# Altium PCB PCB3.PcbDoc
Units mm, origin at the board's own origin, x right, y up, seen from the top; angles counter-clockwise.
Board outline 44.5 x 62.5 mm, 2 copper layers (Top Layer, Bottom Layer); 28 components, 29 nets, 127 pads, 27 vias.
Unrouted connection lines stored in the file: 21.
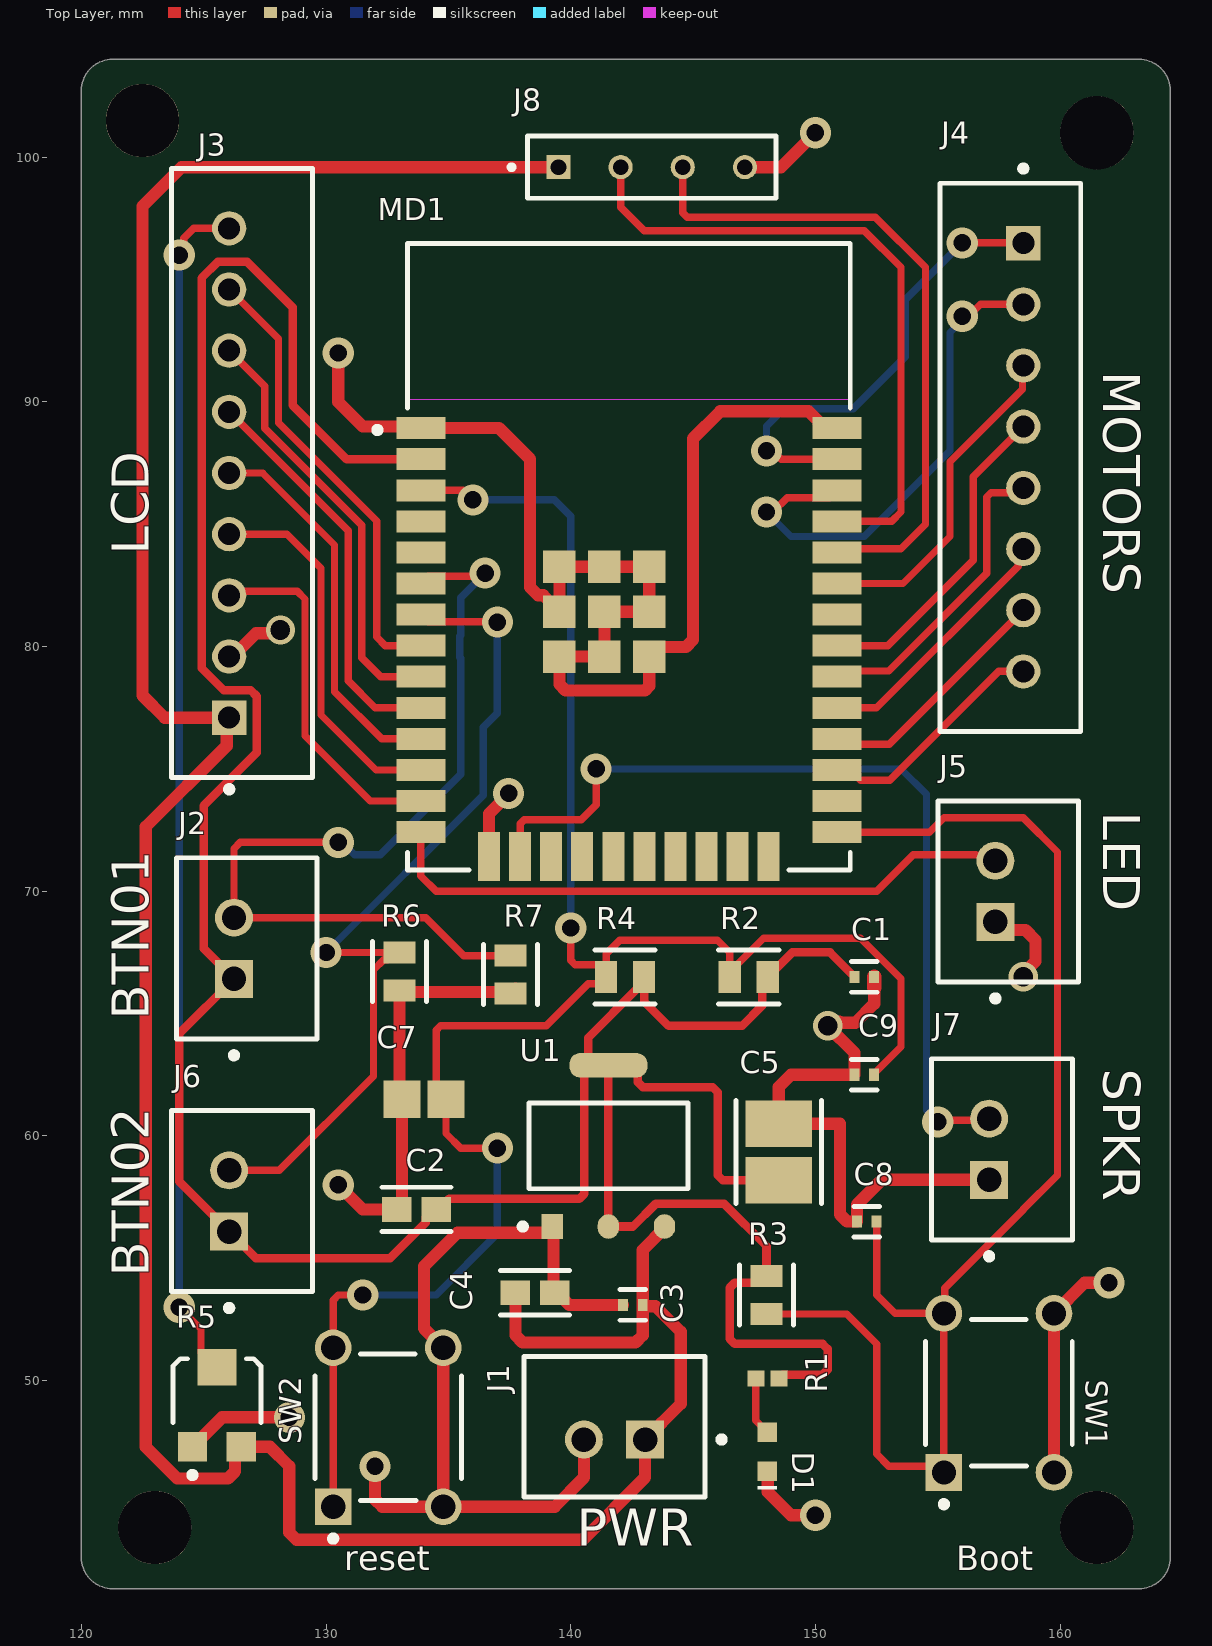
[diagram p0: Top Layer view]
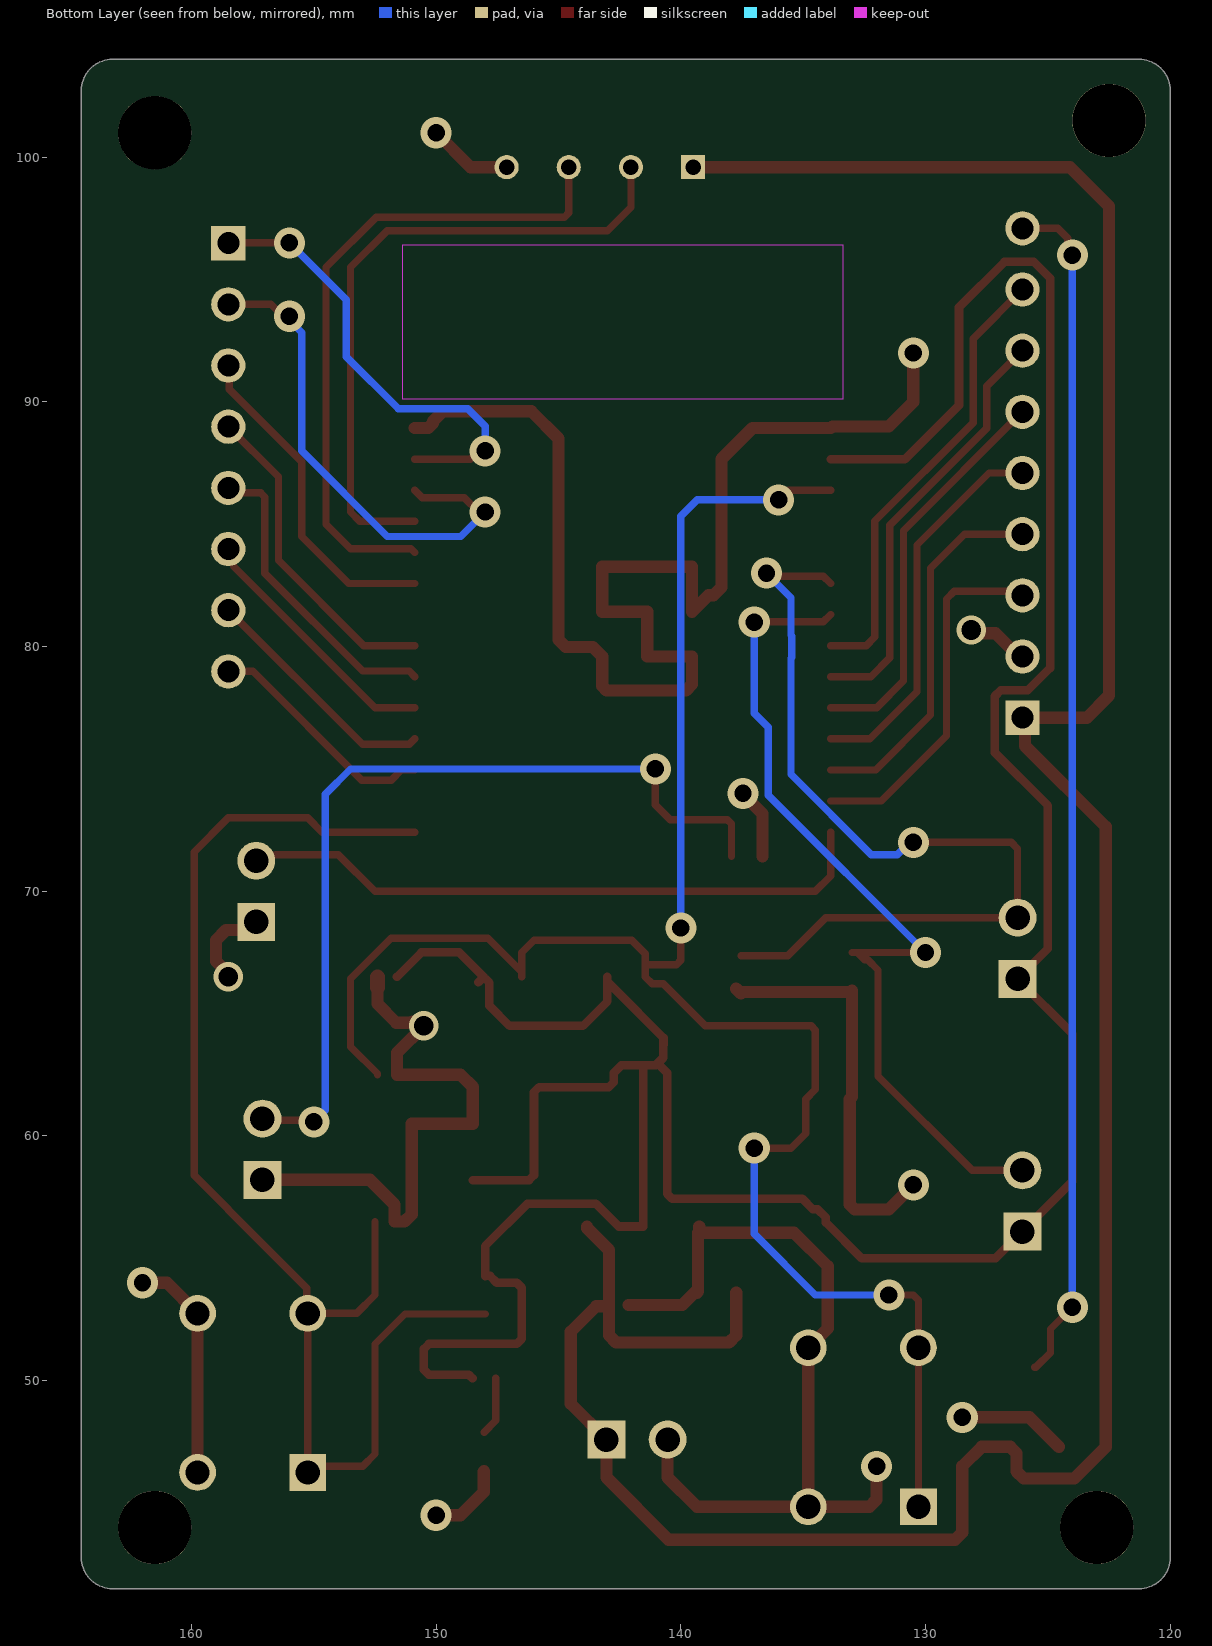
[diagram p1: Bottom Layer view, seen from below]
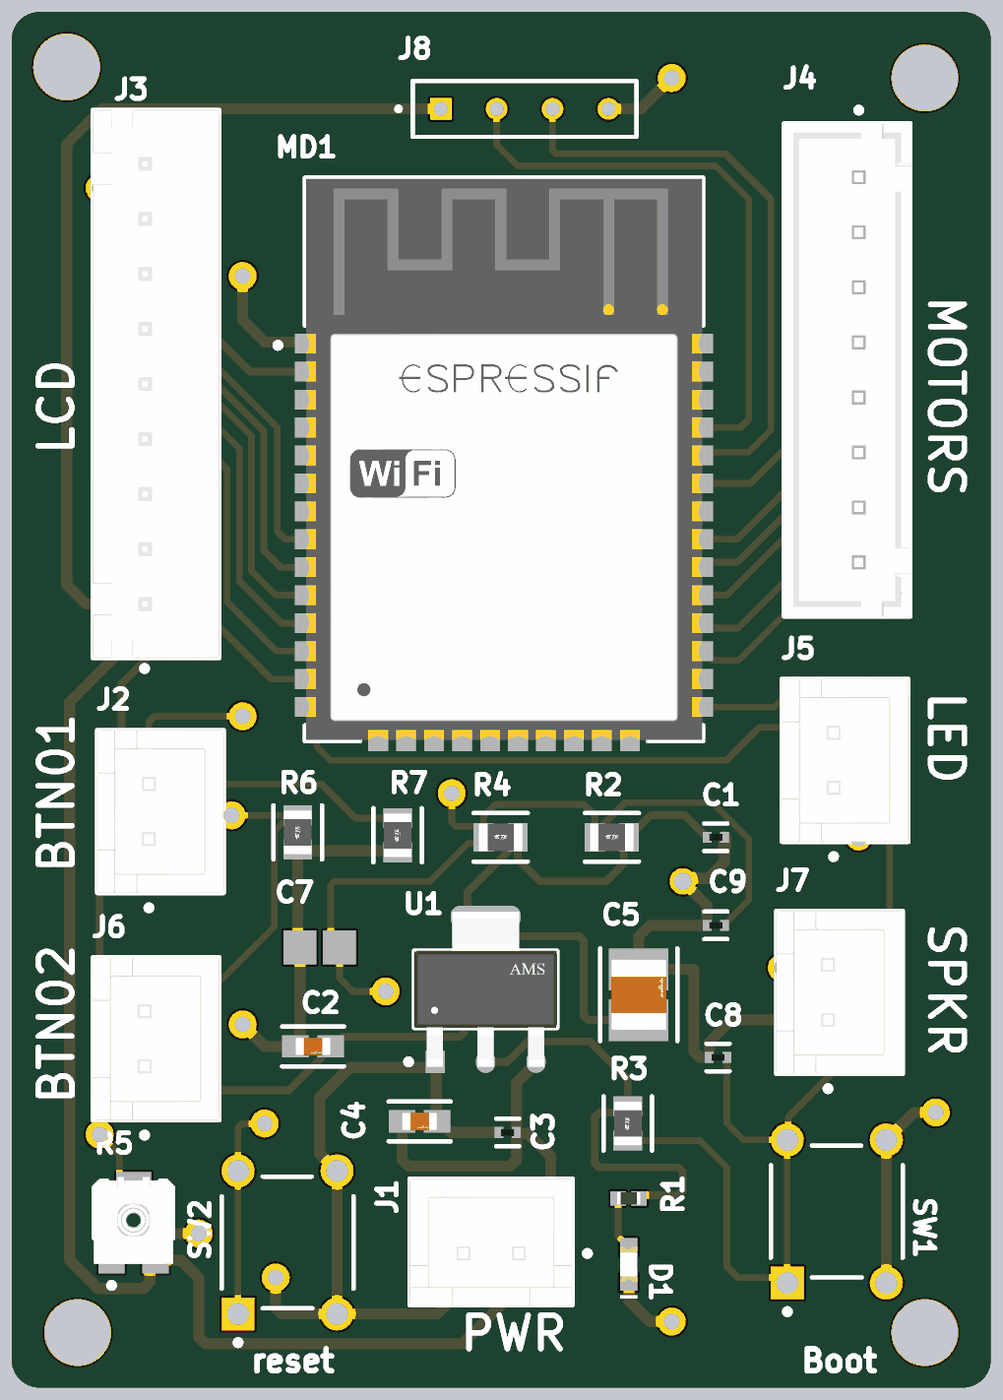
[diagram p2: 3D render of the assembled board from above, using the file's embedded part models]

## Layer stack, top to bottom
Top Solder: solder mask 0.0102, Solder Resist, Dk 3.5
Top Layer: signal copper 0.0356
Dielectric 1: dielectric 0.32, FR-4, Dk 4.8
Bottom Layer: signal copper 0.0356
Bottom Solder: solder mask 0.0102, Solder Resist, Dk 3.5

## Board outline
120,42.77 120,102.73 cw(c121.27,102.73) 121.27,104 163.23,104 cw(c163.23,102.73) 164.5,102.73 164.5,42.77 cw(c163.23,42.77) 163.23,41.5 121.27,41.5 cw(c121.27,42.77)

## Design rules (kind name [scope] priority, off if disabled: settings)
Clearance Clearance_1 [All] p1: gap=0.254 ignorepadtopadclearanceinfootprint=FALSE except(0.25: SMDPad-SMDPad)
Clearance Clearance_1 [OnMid vs OnMid] p2: gap=0.254 ignorepadtopadclearanceinfootprint=FALSE except(0: Arc-Hole Track-Hole SMDPad-Hole THPad-Hole Via-Hole Fill-Hole Poly-Hole Region-Hole Text-Hole Hole-Hole) sourcerule=41 cellrowname=All cellrowtype=0 cellcolname=All cellcoltype=0 innerlayers=TRUE
Clearance Clearance_2 [(ExistsOnLayer('Top Layer') Or ExistsOnLayer('Bottom Layer')) vs (ExistsOnLayer('Top Layer') Or ExistsOnLayer('Bottom Layer'))] p3: gap=0.254 ignorepadtopadclearanceinfootprint=FALSE except(0: Arc-Hole Track-Hole SMDPad-Hole THPad-Hole Via-Hole Fill-Hole Poly-Hole Region-Hole Text-Hole Hole-Hole) sourcerule=41 cellrowname=All cellrowtype=0 cellcolname=All cellcoltype=0 outerlayers=TRUE
Clearance [All] p4: gap=0.254 ignorepadtopadclearanceinfootprint=FALSE ismatrix=TRUE
HoleSize MaxMinHoleSize_1 [All] p1: absolutevalues=TRUE maxlimit=4 minlimit=0.025 maxpercent=80.000 minpercent=20.000
HoleSize [All] p2: absolutevalues=TRUE maxlimit=2.54 minlimit=0.025 maxpercent=80.000 minpercent=20.000
PolygonConnect [All] p1: connectstyle=Relief reliefconductorwidth=0.254 reliefentries=4 polygonreliefangle="90 Angle" airgapwidth=0.254
RoutingTopology RoutingTopology_2 [All] p1: topology=Shortest
RoutingTopology RoutingTopology_1 [All] p2: topology=Daisy_Balanced
RoutingVias RoutingViaStyle_1 [All] p1: holewidth=0.711 width=1.27 viastyle="Through Hole" minholewidth=0.711 minwidth=1.27 maxholewidth=0.711 maxwidth=1.27
SolderMaskExpansion [All] p1: expansion=0.102 istentingtop=FALSE
UnRoutedNet [All] p1: checkbadconnections=TRUE
Width Width_1 [InNet('+5')] p1: maxlimit=0.6 minlimit=0.254 preferedwidth=0.35 minimp=50.000000 maximp=50.000000 favimp=50.000000
Width MaxMinWidth_1 [All] p2: maxlimit=0.7 minlimit=0.3 preferedwidth=0.5 minimp=50.000000 maximp=50.000000 favimp=50.000000
Width [All] p3: maxlimit=0.254 minlimit=0.254 preferedwidth=0.254
27 further rules are at their usual default settings.

## Components (designator, comment, footprint, x,y, rotation, side; value= is the part's Value field where it differs from the comment)
C1 "0.1uF" FP-GRM15-MFG 152,66.5 r0 top value=0.10μF
C2 "10uF" FP-GRM188-0_1-e0_2_0_55-IPC_A 133.698,57 r0 top
C3 "0.1uF" FP-GRM15-MFG 142.54,53.094 r0 top value=0.10μF
C4 "10uF" FP-GRM188-0_1-e0_2_0_55-IPC_A 138.54,53.594 r0 top
C5 "22uf" FP-GRM32E-0_3-0_2-IPC_B 148.5,59.349 r90 top
C7 "1uF" CAPC2013X145X50ML20T25 134,61.5 r0 top
C8 "0.1uF" FP-GRM15-MFG 152.1,56.5 r0 top value=0.10μF
C9 "0.1uF" FP-GRM15-MFG 152,62.5 r0 top value=0.10μF
D1 "150060RS75000" WL-SMCW_0603_150060xx75000 148.04,47.094 r90 top
J1 "B2B-XH-A(LF)(SN)" FP-B2B-XH-A_LF_SN-MFG 141.79,48.119 r180 top
J2 "B2B-XH-A(LF)(SN)" FP-B2B-XH-A_LF_SN-MFG 126.763,67.671 r90 top
J3 "B2B-XH-A(LF)(SN)" FP-B9B-XH-A_LF_SN-MFG 126.565,87.094 r270 top
J4 "B8B-XH-A(LF)(SN)" FP-B8B-XH-A_LF_SN-MFG 157.971,87.737 r90 top
J5 "B2B-XH-A(LF)(SN)" FP-B2B-XH-A_LF_SN-MFG 157.878,69.997 r90 top
J6 "B2B-XH-A(LF)(SN)" FP-B2B-XH-A_LF_SN-MFG 126.565,57.344 r90 top
J7 "B2B-XH-A(LF)(SN)" FP-B2B-XH-A_LF_SN-MFG 157.624,59.456 r90 top
J8 "TS-104-T-A" SAMTEC_TS-104-T-A 143.31,99.594 r0 top
MD1 "ESP32-WROOM-32D" FP-ESP32-WROOM-32D-MFG 142.375,83.669 r0 top
R1 "RC0402JR-0775RL" RESC1005X40X25ML5T10 148.04,50.094 r180 top
R2 "10k" FP-CRG0805-IPC_C 147.276,66.5 r0 top
R3 "10k" FP-CRG0805-IPC_C 148,53.5 r90 top
R4 "10k" FP-CRG0805-IPC_C 142.224,66.5 r0 top
R5 "TC33X-2-103E" BOUR-TC33X-2_V 125.54,49.094 r90 top
R6 "10k" FP-CRG0805-IPC_C 133,66.724 r90 top
R7 "10k" FP-CRG0805-IPC_C 137.54,66.594 r90 top
SW1 "1825910-6" TECO-1825910-6_V 157.5,49.5 r90 top
SW2 "1825910-6" TECO-1825910-6_V 132.54,48.094 r90 top
U1 "AMS1117-3.3" FP-AMS1117-IPC_C 141.54,59.594 r90 top

## Footprints (in the part's own frame and the unit in brackets; to place one, negate y for a bottom-side part, rotate by r counter-clockwise, add the part's x,y. Pads: shape width x height; smd on the part's side, far side on the other; paste and mask are expansions set on the pad)
BOUR-TC33X-2_V [mm] "SMD, 3-Leads, Body 3.8x3.6mm"
  rect 1.2x1.2 smd: 1(-1.8,1) 3(-1.8,-1)
  rect 1.5x1.6 smd: 2(1.45,0)
  silkscreen extent -3.07,-1.8 1.8,1.8, body extent -2,-1.8 1.96,1.8, height 1.15
CAPC2013X145X50ML20T25 [mm] "Chip Capacitor, 2-Leads, Body 2.00x1.25mm, IPC Low Density"
  rect 1.5x1.55 smd: 1(-0.9,0) 2(0.9,0)
  body extent -1.1,-0.72 1.1,0.72, height 1.45
FP-AMS1117-IPC_C [mm]
  rect 1.004x0.872 smd paste+0 mask+0: 1(-3.295,2.29)
  rrect100% 1.004x0.872 smd paste+0 mask+0: 2(-3.295,0) 3(-3.295,-2.29)
  rrect87% 1.004x3.182 smd paste+0 mask+0: 4(3.295,0)
  silkscreen extent -3.42,-3.25 1.75,3.62, body extent -3.9,-3.35 3.9,3.35, height 0.25
FP-B2B-XH-A_LF_SN-MFG [mm]
  rect 1.55x1.55 hole 1 paste-2539.97 mask+0: 1(-1.25,0.525)
  round 1.55 hole 1 paste-2539.97 mask+0: 2(1.25,0.525)
  silkscreen extent -4.5,-2.88 3.7,2.88, body extent -3.8,-2.98 3.8,2.98, height 0.25
FP-B8B-XH-A_LF_SN-MFG [mm]
  rect 1.4x1.4 hole 0.9 paste-2539.97 mask+0: 1(8.75,-0.525)
  round 1.4 hole 0.9 paste-2539.97 mask+0: 2(6.25,-0.525) 3(3.75,-0.525) 4(1.25,-0.525) 5(-1.25,-0.525) 6(-3.75,-0.525) 7(-6.25,-0.525) 8(-8.75,-0.525)
  silkscreen extent -11.2,-2.88 11.92,2.87, body extent -11.3,-2.98 11.3,2.98, height 0.25
FP-B9B-XH-A_LF_SN-MFG [mm]
  rect 1.4x1.4 hole 0.9 paste-2539.97 mask+0: 1(10,-0.525)
  round 1.4 hole 0.9 paste-2539.97 mask+0: 2(7.5,-0.525) 3(5,-0.525) 4(2.5,-0.525) 5(0,-0.525) 6(-2.5,-0.525) 7(-5,-0.525) 8(-7.5,-0.525) 9(-10,-0.525)
  silkscreen extent -12.45,-2.87 13.05,2.88, body extent -12.55,-2.98 12.55,2.98, height 0.25
FP-CRG0805-IPC_C [mm]
  rect 0.906x1.307 smd paste+0 mask+0: 1(-0.776,0) 2(0.776,0)
  silkscreen extent -1.23,-1.1 1.23,1.1, body extent -1.33,-0.8 1.33,0.8, height 0.25
FP-ESP32-WROOM-32D-MFG [mm]
  rect 2x0.9 smd paste+0 mask+0: 1(-8.5,5.26) 2(-8.5,3.99) 3(-8.5,2.72) 4(-8.5,1.45) 5(-8.5,0.18) 6(-8.5,-1.09) 7(-8.5,-2.36) 8(-8.5,-3.63) 9(-8.5,-4.9) 10(-8.5,-6.17) 11(-8.5,-7.44) 12(-8.5,-8.71) 13(-8.5,-9.98) 14(-8.5,-11.25) 25(8.5,-11.25) 26(8.5,-9.98) 27(8.5,-8.71) 28(8.5,-7.44) 29(8.5,-6.17) 30(8.5,-4.9) 31(8.5,-3.63) 32(8.5,-2.36) 33(8.5,-1.09) 34(8.5,0.18) 35(8.5,1.45) 36(8.5,2.72) 37(8.5,3.99) 38(8.5,5.26)
  rect 0.9x2 smd paste+0 mask+0: 15(-5.715,-12.25) 16(-4.445,-12.25) 17(-3.175,-12.25) 18(-1.905,-12.25) 19(-0.635,-12.25) 20(0.635,-12.25) 21(1.905,-12.25) 22(3.175,-12.25) 23(4.445,-12.25) 24(5.715,-12.25)
  rect 1.33x1.33 smd paste+0 mask+0: 39(-2.835,-4.075) 39(-2.835,-2.24) 39(-2.835,-0.405) 39(-1,-4.075) 39(-1,-2.24) 39(-1,-0.405) 39(0.835,-4.075) 39(0.835,-2.24) 39(0.835,-0.405)
  Keep-Out Layer region: -9,6.45 9,6.45 9,12.75 -9,12.75
  Keep-Out Layer region: -9,6.45 9,6.45 9,12.75 -9,12.75
  silkscreen extent -10.4,-12.8 9.05,12.8, body extent -9.6,-13.35 9.6,12.9, height 0.25
FP-GRM15-MFG [mm]
  rect 0.4x0.5 smd paste+0 mask+0: 1(-0.4,0) 2(0.4,0)
  silkscreen extent -0.53,-0.62 0.53,0.62, body extent -0.7,-0.38 0.7,0.38, height 0.25
FP-GRM32E-0_3-0_2-IPC_B [mm]
  rect 1.903x2.706 smd paste+0 mask+0: 1(-1.151,0) 2(1.151,0)
  silkscreen extent -2.1,-1.75 2.1,1.75, body extent -2.35,-1.6 2.35,1.6, height 0.25
FP-GRM188-0_1-e0_2_0_55-IPC_A [mm]
  rect 1.208x1.012 smd paste+0 mask+0: 1(-0.802,0) 2(0.802,0)
  silkscreen extent -1.41,-0.91 1.41,0.91, body extent -1.91,-1.01 1.91,1.01, height 0.25
RESC1005X40X25ML5T10 [mm] "Chip Resistor, 2-Leads, Body 1.05x0.55mm, IPC Low Density"
  rect 0.7x0.65 smd: 1(-0.475,0) 2(0.475,0)
  body extent -0.53,-0.28 0.53,0.28, height 0.4
SAMTEC_TS-104-T-A [mm]
  rect 0.985x0.985 hole 0.635: 01(-3.81,0)
  round 0.985 hole 0.635: 02(-1.27,0) 03(1.27,0) 04(3.81,0)
  silkscreen extent -5.83,-1.27 5.08,1.27
TECO-1825910-6_V [mm] "Switch, 4-Leads, Body 5.99x5.99mm"
  rect 1.5x1.5 hole 0.99: 1(-3.25,2.25)
  round 1.5 hole 0.99: 2(3.25,2.25) 3(-3.25,-2.25) 4(3.25,-2.25)
  silkscreen extent -4.67,-2.99 2.99,3, body extent -3,-2.99 2.99,3, height 5
WL-SMCW_0603_150060xx75000 [mm] "SMD Mono-color Chip LED, body 1.6x0.8mm"
  rect 0.8x0.8 smd: 1(-0.8,0) 2(0.8,0)
  silkscreen extent -1.55,-0.4 -1.4,0.4, body extent -0.8,-0.4 0.8,0.4, height 0.7

## Part data
C1 C3 C8 C9: library part CMP-2100-03641-2, "CAP CER 0.1UF 16V X7R 0402", Capacitance=0.10μF, Manufacturer=Murata, Manufacturer Part Number=GRM155R71C104KA88D, Package=GRM15, Temperature="-55°C to +125°C", Temperature Characteristic=X7R, Temperature Range High=+125°C, Temperature Range Low=-55°C, Tolerance=10%, Voltage Rating=16Vdc, Category=Cap, ComponentLink2Description=Datasheet, ComponentLink2URL=https://search.murata.co.jp/Ceramy/image/img/A01X/G101/ENG/GRM155R71H471KA01-01A.pdf, Device Class L1="Passive Components", Device Class L2=Capacitors, Device Class L3="Ceramic Capacitors", Digikey Description="CAP CER 0.1UF 16V X7R 0402", Height=0.55mm, Ipc Land Pattern Name=CAPC10050X219, Lead Free=yes, Material=Ceramic, Mouser Description="0402 0.1 uF 16V ±10 % Tolerance X7R SMT Multilayer Ceramic Capacitor", Octopart=https://octopart.com/grm155r71c104ka88d-murata-196880, RoHS=TRUE, Standoff Height=0mm
C2 C4: library part CMP-2006-02792-2, "Chip Multilayer Ceramic Capacitors for General Purpose, 0603, 10uF, X5R, 15%, 20%, 6.3V", Case Code (Imperial)=0603, Case Code (Metric)=1608, Dielectric=X5R, Max Operating Temperature=85°C, Min Operating Temperature=-55°C, Package Quantity=4000, Tolerance=20%, Voltage=6.3V, Capacitance=10uF, Case/Package=0603, Depth=0.8mm, Height=0.8mm, Lead Free="Lead Free", Length=1.6mm, Material=Ceramic, Mount="Surface Mount", Packaging="Tape and Reel", Radiation Hardening=No, REACH SVHC="No SVHC", Termination=SMD/SMT, Thickness=0.035inch, Voltage Rating=6.3V, Voltage Rating (DC)=6.3V, Width=0.031inch
C5: library part CMP-06035-011048-1, "Chip Multilayer Ceramic Capacitors for General Purpose, 1210, 22uF, X7R, 15%, 10%, 16V", Capacitance=22uF, Case Code (Imperial)=1210, Case Code (Metric)=3225, Dielectric=X7R, Max Operating Temperature=125°C, Min Operating Temperature=-55°C, Package Quantity=1, Resistor Type=Ceramic, Tolerance=10%, Voltage=16V, Case/Package=1210, Depth=1.6mm, Height=2.5mm, Lead Free="Lead Free", Length=3.2mm, Material=Ceramic, Mount="Surface Mount", Packaging="Tape and Reel", Radiation Hardening=No, REACH SVHC="No SVHC", Termination=SMD/SMT, Thickness=0.106inch, Voltage Rating=16V, Voltage Rating (DC)=16V, Weight=0.00388oz, Width=2.5mm
C7: library part CMP-1036-04731-2, Manufacturer=Kemet, Part Number=C0805C105K9PACTU
D1: library part CMP-1426-00001-3, Case Code (Imperial)=0603, Case Code (Metric)=1608, Color=Red, Forward Current=100mA, Forward Voltage=2V, Max Junction Temperature (Tj)=95°C, Max Operating Temperature=85°C, Max Reverse Voltage (DC)=5V, Min Operating Temperature=-40°C, Power Dissipation=72mW, Test Current=20mA, Case/Package=0603, Dominant Wavelength=625nm, Height=700µm, Length=1.6mm, Lens Style="Clear, Rectangular", Luminous Intensity=250mcd, Mount="Surface Mount", NexarPartId=29717776, Packaging="Tape and Reel", Peak Wavelength=630nm, REACH SVHC=Unknown, Reverse Voltage=5V, RoHS=Compliant, Viewing Angle=140°, Wavelength=625nm, Width=800µm
J1 J2 J3 J5 J6 J7: library part CMP-2000-05888-3, "CONN HEADER VERT 2POS 2.5MM", Color=Natural, Contact Resistance=20mR, Current Rating=3A, Housing Color=White, Insulation Resistance=1GR, Max Operating Temperature=85°C, Max Voltage Rating (AC)=250V, Min Operating Temperature=-25°C, Connector Type="Male Pin", Contact Material=Brass, Contact Plating=Tin, Contact Type="Male Pin", Depth=5.75mm, Fastening Type=Detent, Housing Material=Polyamide, Lead Free="Lead Free", Lead Pitch=2.5mm, Length=7.4mm, Max Current Rating=3A, Max Voltage Rating (DC)=250V, Mount="Through Hole", Number of Contacts=2, Number of Positions=2, Number of Rows=1, Orientation=Straight, Packaging=Bulk, Pitch=2.5mm, REACH SVHC="No SVHC", Series=XH, Termination=Solder, Voltage Rating=250V, Voltage Rating (AC)=250V, Wire/Cable Gauge=22AWG
J4: library part CMP-17438-000015-1, "CONN HEADER VERT 8POS 2.5MM", Color=Natural, Contact Resistance=20mR, Current Rating=3A, Housing Color=White, Insulation Resistance=1GR, Max Operating Temperature=85°C, Max Voltage Rating (AC)=250V, Min Operating Temperature=-25°C, Connector Type="Male Pin", Contact Material=Brass, Contact Plating=Tin, Contact Type="Male Pin", Depth=5.75mm, Fastening Type=Detent, Housing Material=Polyamide, Lead Free="Lead Free", Lead Pitch=2.5mm, Length=22.4mm, Max Current Rating=3A, Mount="Through Hole", Number of Contacts=8, Number of Positions=8, Number of Rows=1, Orientation=Straight, Packaging=Bulk, Pitch=2.5mm, REACH SVHC="No SVHC", Series=XH, Termination=Press-Fit, Voltage Rating=250V, Voltage Rating (AC)=250V, Wire/Cable Gauge=22AWG
J8: "TS - Samtec 2.54mm Single Row Machined Terminal Strip - Fast Stock", Package=None, Supplier Part Number 1=SAM1112-04-ND, Availability="In Stock", Check_prices=https://www.snapeda.com/parts/TS-104-T-A/Samtec+Inc./view-part/?ref=eda, MF="Samtec Inc.", MP=TS-104-T-A, Price=None, Purchase-URL=https://pricing.snapeda.com/search/part/TS-104-T-A/?ref=eda, SnapEDA_Link=https://www.snapeda.com/parts/TS-104-T-A/Samtec+Inc./view-part/?ref=snap, Supplier 1=Digikey
MD1: library part CMP-194065-000003-1, "WIFI MODULE 32MBITS SPI FLASH", Manufacturer="Espressif Systems", Max Frequency=2484MHz, Max Supply Voltage=3.6V, Min Supply Voltage=3V, Nominal Supply Current=500mA, Temperature="-40°C to +85°C", Temperature Range High=+85°C, Temperature Range Low=-40°C, Automotive=No, Bandwidth=72MHz, Category=UNK, ComponentLink2Description=Datasheet, ComponentLink2URL=https://www.espressif.com/sites/default/files/documentation/esp32-wroom-32d_esp32-wroom-32u_datasheet_en.pdf, Data Rate=150Mbits/s, Device Class L1="Integrated Circuits (ICs)", Device Class L2="RF Semiconductors and Devices", Device Class L3=Transceivers, Digikey Description="WIFI MODULE 32MBITS SPI FLASH", Height=3.2mm, Interface=I2C,SPI,UART,Ethernet,I2S,Other, Lead Free=Yes, Manufacturer Part Number=ESP32-WROOM-32D, Mouser Description="Wi-Fi/BT BLE Module ESP32-D0WD, SPI Flash, UART, P", Number Of Adc Channels=16, Number Of Gpio=32, Octopart=https://octopart.com/esp32-wroom-32d-espressif+systems-91040050, Package=ESP32-WROOM-32D, RoHS=TRUE, Sensitivity=-98dBm
R1: library part CMP-2002-08044-2, "Chip Resistor, 75 Ohm, +/- 5%, 0.063 W, -55 to 155 degC, 0402 (1005 Metric), RoHS, Tape and Reel", Case Code (Imperial)=0402, Case Code (Metric)=1005, Max Operating Temperature="155 degC", Min Operating Temperature="-55 degC", Package Quantity=200, Power Rating="62.5 mW", Resistance="75 Ohm", Tolerance=5%, Voltage Rating="50 V", Case/Package=0402, ComponentLink1Description="Manufacturer URL", ComponentLink1URL=http://www.yageo.com/, ComponentLink2Description=Datasheet, ComponentLink2URL=http://www.yageo.com/documents/recent/PYu-RC_Group_51_RoHS_L_04.pdf, DatasheetVersion="Rev. 4, 02/2016", Height="0.35 mm", Length="1 mm", Mount="Surface Mount", Mounting Technology="Surface Mount", PackageDescription="2-Pin Surface Mount Device, Body 1 x 0.5 mm", Packaging="Tape and Reel", PartNumber=RC0402JR-0775RL, Radiation Hardening=No, REACH SVHC="No SVHC", RoHSCompliant=true, Width="0.5 mm"
R2 R3 R4 R6 R7: library part CMP-03211-011401-1, "RES SMD 10K OHM 1% 1/8W 0805", Case/Package=0805, Max Operating Temperature=125°C, Min Operating Temperature=-55°C, Number of Resistors=1, Power Rating=125mW, Resistance=10kR, Resistor Type="Thick Film", Temperature Coefficient=100ppm/°C, Tolerance=1%, Voltage Rating=150V, Depth=1.25mm, ELV=Compliant, Height=0.55mm, Length=2mm, Mount="Surface Mount", Number of Terminations=2, Packaging="Tape and Reel", Radiation Hardening=No, RoHS Compliant=Yes, Series="CRG Series", Technology="THICK FILM", Termination=Solder
R5: library part CMP-2100-03695-1, "Trimming Potentiometer, 10000 Ohm, -40 to 100 degC, 3-Pin SMD, RoHS, Tape and Reel", Case/Package=SMD/SMT, Colour=Silver, Manufacturer=Bourns, Max Operating Temperature=100degC, Max Power Dissipation=100mW, Min Operating Temperature=-40degC, Package Description="3-Pin Surface Mount Device, Body 3.8 x 3.6 mm", Package Quantity=2500, Package Reference=TC33X-2, Resistance=10KOhm, Temperature Coefficient=250ppm/degreesC, Tolerance=25%, Voltage Rating (DC)=50V, Composition=Potentiometer, Contact Plating=Silver, Datasheet URL=http://www.bourns.com/docs/Product-Datasheets/TC33.pdf, Datasheet Version=42583.0, Depth=3.8mm, Height=0.047inch, Lead Free=LeadFree, Length=3mm, Manufacturer URL=http://www.bourns.com/, Military Standard=Not, Mount=SurfaceMount, Number of Turns=1, Packaging=TapeandReel, Power Rating=100mW, Radiation Hardening=No, REACH SVHC=NoSVHC, RoHSCompliant=true, Taper=Linear, Termination=FootPrint, Weight=29.4mg, Width=0.118inch
SW1 SW2: library part CMP-1684-00021-1, "Tact Switch, SPST-NO, 0.05 A, -35 to 85 degC, 4-Pin THD, RoHS, Bulk", Actuator Color=Black, Contact Rating @ Voltage=0.05A@24VDC, Dielectric Strength=500VAC, Manufacturer="TE Connectivity", Maximum AC Voltage Rating=N/A, Maximum Contact Resistance=100mOhm, Maximum DC Voltage Rating=24V, Minimum Insulation Resistance=100MOhm, Operating Temperature=-35to85C, Package Description="4-Pin Through Hole Device, Body 5.99 x 5.99 mm, Pitch 6.5 mm", Package Reference=THD, Actuator Length=1.4mm, Actuator Material=PolybutyleneTerephthalate, Actuator Style=RoundButton, Base Material=N/A, Body Orientation=Straight, Bushing Type=Unthreaded, Contact Material=CopperAlloy, Contact Plating=Silver, Datasheet URL=http://www.te.com/commerce/DocumentDelivery/DDEController?Action=showdoc&DocId=Customer+Drawing%7F1825910%7FC9%7Fpdf%7FEnglish%7FENG_CD_1825910_C9.pdf%7F1825910-6, Datasheet Version="Rev. C9", Dimension=5.99x5mm, Electrical Life=100000Cycles, Family=1825910, Function=MomentaryContact, Housing Material=N/A, Illumination=N/R, Manufacturer URL=http://www.te.com, Mechanical Life=100000Cycles, Mounting=ThroughHole, Packaging=N/A, Part No=1825910-6, Pole Throw Configuration=SPST, Product Weight=N/A, RoHS=Yes, Seal Description=N/A, Seal Location=N/A, Switch Configuration=OFF(ON), Terminal Type=PCPins, Thread Size=N/R
U1: library part CMP-209535-000001-1, "LDO Voltage Regulators 1A, 3.3V", Dropout Voltage=1.1V, Manufacturer="Advanced Monolithic Systems", Max Junction Temp=+125°C, Max Power Dissipation=1.2W, Max Supply Voltage=15V, Nominal Supply Current=5mA, Output Current=1A, Output Voltage=3.3V, Package=AMS1117, Temperature="-40°C to +125°C", Temperature Range Low=-40°C, Automotive=No, Category=IC, ComponentLink2Description=Datasheet, ComponentLink2URL=http://www.advanced-monolithic.com/pdf/ds1117.pdf, Device Class L1="Integrated Circuits (ICs)", Device Class L2="Power Management ICs", Device Class L3="Voltage Regulators - Linear", Height=1.8mm, Ipc Land Pattern Name=SOT229P700X180-4, Lead Free=Yes, Manufacturer Part Number=AMS1117-3.3, Number Of Outputs=1, Octopart=https://octopart.com/ams1117-3.3-advanced+monolithic+systems-25899300, Output Type=Fixed, RoHS=TRUE, Standoff Height=0.64mm, Temperature Range High=+125°C

## Free pads (board coordinates)
  round 3 hole 3: 2(161.5,44) 3(122.5,101.5) 4(161.5,101) 5(123,44)

## Via types
v1: diameter 1.27, hole 0.711, Top Layer to Bottom Layer, 24 vias
v2: diameter 1.2, hole 0.8, Top Layer to Bottom Layer, 3 vias

## Nets (pads, with @x,y where several pads share a name; then routed paths per layer and width w, separated by ;. In a path a pad name is that pad's centre, name@x,y a point inside that pad or via, vN(x,y) a via of type N, cw(c..) or ccw(c..) an arc to the next point about the centre after c; other vN are vias at no path point)
+5: C3.2 C4.1 J1.1 J8.01 R5.1 U1.3 | length 123.9
  Top Layer w0.5: R5.1 125.746,48.5 v1(128.5,48.5) ; C4.1 137.738,51.853 138.031,51.56 142.647,51.56 142.94,51.853 142.94,53.044 C3.2 ; J8.01 124.094,99.594 122.5,98 122.5,78 123.406,77.094 126.04,77.094 125.937,76.991 125.937,75.937 122.635,72.635 122.635,47.286 123.921,46 125.988,46 126.28,46.293 126.28,47.034 126.54,47.294 127.706,47.294 128.5,46.5 128.5,43.793 128.793,43.5 140.5,43.5 143.04,46.04 J1.1 144.5,49.054 144.5,52 143.456,53.044 142.99,53.044 C3.2 ; U1.3 143.83,56.233 142.94,55.343 C3.2
CHIP_PU: C7.2 C9.2 MD1.3 R2.1 R4.1 SW2.1 SW2.2 | length 80.7
  Top Layer w0.3: SW2.1 130.29,53.29 130.5,53.5 v1(131.5,53.5) ; MD1.3 135.611,86.389 v1(136,86) ; v1(137,59.5) 135.5,59.5 134.9,60.1 C7.2 134.5,61.9 134.5,64.324 134.676,64.5 139,64.5 140,65.5 140.721,66.221 141.168,66.221 R4.1 R4.1@141.448,67 ; v1(140,68.5) 140,67.176 140.176,67 R4.1@141.448,67 ; R2.1 R2.1@146.5,66.701 ; C9.2 152.4,62.55 153.5,63.65 153.5,66.421 151.842,68.079 147.878,68.079 R2.1@146.5,66.701 ; R4.1@141.448,67 141.448,67.448 142,68 146,68 146.5,67.5 R2.1@146.5,66.701
  Bottom Layer w0.3: v1(131.5,53.5) 134.5,53.5 137,56 v1(137,59.5) ; v1(136,86) 139.324,86 140,85.324 v1(140,68.5)
GND: C1.2 C2.1 C3.1 C4.2 C5.2 C7.1 C8.1 C9.1 D1.1 J1.2 J5.1 J7.1 J8.04 MD1.1 MD1.15 MD1.38 MD1.39 R5.3 R6.1 R7.1 SW1.3 SW1.4 SW2.3 SW2.4 U1.1 | length 150.8
  Top Layer w0.5: v1(130.5,58) 131.5,57 C2.1 133.1,57.204 C7.1 133,61.6 R6.1 133.065,65.883 137.475,65.883 R7.1 R7.1@137.743,66.021 ; v1(130.5,92) 130.5,90 131.5,89 133.804,89 MD1.1 137.071,88.929 138.333,87.667 138.333,82.428 138.666,82.095 138.874,82.095 139.54,81.429 139.54,83.264 141.375,83.264 143.21,83.264 143.21,81.429 141.375,81.429 141.375,79.594 139.54,79.594 139.54,78.46 139.79,78.21 143.034,78.21 143.21,78.386 143.21,79.594 143.604,79.988 144.707,79.988 145,80.28 145,88.5 146.115,89.615 149.717,89.615 150.125,89.207 150.125,89.129 150.325,88.929 MD1.38 ; v1(132,46.5) 132,45.137 132.293,44.844 SW2.3 ; MD1.15 136.66,73.169 137.461,73.97 v1(137.461,74) ; U1.1 139.25,56.233 139.064,56.047 135.37,56.047 134,54.677 134,52.137 134.79,51.347 SW2.3 ; U1.1@139.296,56.047 139.296,53.64 C4.2 139.44,53.594 139.94,53.094 C3.1 ; J1.2 140.54,46.04 139.344,44.844 SW2.3 ; J8.04 148.594,99.594 v1(150,101) ; D1.1 148.053,46.281 148.053,45.447 149,44.5 v1(150,44.5) ; v2(150.5,64.5) 151.6,63.4 C9.1 149,62.5 148.5,62 C5.2 151,60.5 151,56.793 151.293,56.5 C8.1 151.7,57.2 152.706,58.206 J7.1 ; v2@150.962,64.628 151.628,64.628 152.4,65.4 152.4,66.067 ; J5.1 157.685,68.415 158.585,68.415 159,68 159,67.143 158.5,66.643 v2(158.5,66.5) ; SW1.3 SW1.4 161,54 v1(162,54)
  Top Layer w0.6: v2(150.5,64.5) 150.628,64.628 v2@150.962,64.628 ; 152.4,66.067 C1.2
GPIO: C8.2 MD1.25 R3.1 SW1.1 SW1.2 | length 55.7
  Top Layer w0.3: R3.1 151.276,52.724 152.5,51.5 152.5,47 153,46.5 155,46.5 SW1.1 155.25,47.25 ; MD1.25 154.665,72.419 155.253,73.007 158.493,73.007 159.893,71.607 159.893,58.393 158.5,57 158.5,56.986 155.289,53.774 SW1.2@155.289,52.789 ; C8.2 152.5,53.5 153.25,52.75 SW1.2 ; 155.249,47.25 SW1.2@155.249,52.749
IO2: J5.2 MD1.24
IO4: J4.1 MD1.26
IO12: MD1.14 | length 26.3
  Top Layer w0.3: MD1.14 133.875,70.625 134.5,70 152.5,70 154,71.5 156.552,71.5 156.566,71.486 157.114,71.486 157.353,71.247
IO13: J7.2 MD1.16 | length 35.9
  Top Layer w0.3: MD1.16 137.93,72.754 138.106,72.93 140.43,72.93 141.039,73.539 v1(141.039,75) ; v1(155,60.578) 155.064,60.642 157.035,60.642 J7.2
  Bottom Layer w0.3: v1(141.039,75) 153.5,75 154.539,73.961 154.539,61.039 v1(155,60.578)
IO14: MD1.13 | length 14.7
  Top Layer w0.3: 126.04,82.094 126.206,82.26 128.824,82.26 129.14,81.944 129.14,76.36 131.811,73.689 MD1.13
IO15: J3.1 MD1.23
IO16: J4.2 MD1.27 | length 9.6
  Top Layer w0.3: MD1.27 151.425,74.959 151.841,74.543 153.043,74.543 157.487,78.987 158.496,78.987
IO17: J4.3 MD1.28 | length 10
  Top Layer w0.3: MD1.28 151.1,76.004 153.013,76.004 158.496,81.487
IO18: J4.4 MD1.30 | length 12.6
  Top Layer w0.3: MD1.30 151.106,79 153,79 157,83 157,86.116 157.176,86.292 158.301,86.292 158.496,86.487
IO19: J4.5 MD1.31 | length 13.3
  Top Layer w0.3: MD1.31 152.961,80.039 156.446,83.524 156.446,86.937 158.496,88.987
IO21: J4.6 MD1.33 | length 13.6
  Top Layer w0.3: MD1.33 153.579,82.579 155.5,84.5 155.5,87.552 158.46,90.513 158.46,91.451 158.496,91.487
IO22: J4.7 MD1.36 | length 21
  Top Layer w0.3: v1(148,85.5) 148.262,85.5 148.851,86.089 150.575,86.089 MD1.36 ; v1(156,93.5) 156.262,93.5 156.749,93.987 158.496,93.987
  Bottom Layer w0.3: v1(148,85.5) 149,84.5 152,84.5 155.5,88 155.5,92.839 156,93.339 v1(156,93.5)
IO23: J4.8 MD1.37 | length 19
  Top Layer w0.3: v1(148,88) 148.262,88 148.603,87.659 MD1.37 ; v1(156,96.5) 158.483,96.5 158.496,96.487
  Bottom Layer w0.3: v1(148,88) 148,89 148.715,89.715 151.542,89.715 153.678,91.851 153.678,94.178 v1(156,96.5)
IO25: MD1.10 | length 16.4
  Top Layer w0.3: 126.04,89.594 130.902,84.732 130.902,78.598 132,77.5 132.5,77.5 132.501,77.499 MD1.10
IO26: MD1.11 | length 15.9
  Top Layer w0.3: 126.04,87.094 127.406,87.094 130.348,84.152 130.348,78.152 132.271,76.229 MD1.11
IO27: MD1.12 | length 15.3
  Top Layer w0.3: 126.04,84.594 128.406,84.594 129.794,83.206 129.794,77.206 132.041,74.959 MD1.12
IO32: MD1.8 | length 18.6
  Top Layer w0.3: 126.04,94.594 128.054,92.58 128.054,89.147 132.071,85.13 132.071,80.393 132.425,80.039 MD1.8
IO33: MD1.9 | length 17.5
  Top Layer w0.3: 126.04,92.094 127.5,90.634 127.5,88.917 131.456,84.961 131.456,79.544 132.231,78.769 MD1.9
IO34: J2.2 MD1.6 R7.2 | length 37.2
  Top Layer w0.3: v1(130.5,72) 126.5,72 126.238,71.738 J2.2 134.079,68.921 135.63,67.37 R7.2 ; MD1.6 134.175,82.879 136.379,82.879 v1(136.5,83)
  Bottom Layer w0.3: v1(130.5,72) 130.661,72 131.161,71.5 132.217,71.5 135.5,74.783 135.5,79.531 135.461,79.57 135.461,80.43 135.5,80.469 135.5,82 v1(136.5,83)
IO35: J6.2 MD1.7 R6.2 | length 35.8
  Top Layer w0.3: J6.2 128.094,58.594 131.942,62.442 131.942,66.781 132.359,67.197 132.496,67.197 132.799,67.5 R6.2 v1(130,67.5) ; MD1.7 134.175,81.009 136.991,81.009 v1(137,81)
  Bottom Layer w0.3: v1(130,67.5) 136.422,73.922 136.422,76.698 137,77.276 v1(137,81)
NetD1_2: D1.2 R1.2 | length 2.4
  Top Layer w0.3: R1.2 147.565,48.369 D1.2
NetJ9_3: R5.2
RX: J8.03 MD1.34 | length 27.3
  Top Layer w0.3: J8.03 144.58,97.73 144.756,97.554 152.446,97.554 154.5,95.5 154.5,85 153.5,84 151.026,84 MD1.34
TX: J8.02 MD1.35 | length 26.9
  Top Layer w0.3: J8.02 142.04,97.96 143,97 152,97 153.5,95.5 153.5,85.5 153.119,85.119 MD1.35
VCC_3V3: C1.1 C2.2 C5.1 J2.1 J3.2 J6.1 MD1.2 R1.1 R2.2 R3.2 R4.2 U1.2 U1.4 | length 137.4
  Top Layer w0.35: MD1.2 130.841,87.659 128.633,89.867 128.633,93.867 126.777,95.723 125.572,95.723 124.911,95.062 124.911,79.126 125.814,78.223 126.918,78.223 127.169,77.972 127.169,75.669 125,73.5 125,67.659 J2.1 124,64.183 124,58.134 127.134,55 132.613,55 134.071,56.458 134.071,56.669 134.402,57 134.598,57 135.033,57.435 140.356,57.435 140.561,57.64 140.561,62.582 U1.4@140.868,62.889 ; R4.2@142.722,66.021 140.71,64.009 140.71,63.719 140.718,63.711 140.718,63.196 141.025,62.889 U1.4 ; R4.2@142.722,66.021 R4.2@143,66.299 ; R4.2 R4.2@143,66.299 ; R3.2@147.8,54.276 147.523,54 146.705,54 146.5,53.795 146.5,51.705 146.705,51.5 150.295,51.5 150.5,51.295 150.5,50.449 150.295,50.244 148.665,50.244 R1.1 ; R2.2@147.952,66.4 147.821,66.269 147.821,65.321 147,64.5 144,64.5 143,65.5 R4.2@143,66.299 ; R3.2 148,55.5 146.27,57.23 143.472,57.23 142.541,56.299 U1.2 U1.4 ; R2.2@148.276,66.276 R2.2 149.052,67.5 150.6,67.5 C1.1 ; C5.1 146.205,58.199 146,58.404 146,61.795 145.795,62 142.941,62 142.736,62.205 142.736,62.582 142.429,62.889 U1.4
  Top Layer w0.5: J3.2 126.189,79.594 127.14,80.545 128.002,80.545 v2(128.136,80.679)
pads on no net: J3.3 J3.4 J3.5 J3.6 J3.7 J3.8 J3.9 MD1.4 MD1.5 MD1.17 MD1.18 MD1.19 MD1.20 MD1.21 MD1.22 MD1.29 MD1.32
copper on no net: | length 59.5
  Top Layer w0.3: v1(124,53) 124.89,52.11 124.89,51.144 125.49,50.544 125.54,50.544 ; v1(124,96) 124.186,96.186 124.186,96.686 124.594,97.094 126.04,97.094 ; 150.875,77.499 152.499,77.499 158.286,83.286 158.286,83.777 158.496,83.987
  Bottom Layer w0.3: v1(124,53) v1(124,96)

## Silkscreen, mask and mechanical layers (free items; w line width, h text height)
Top Overlay:
  text "MOTORS" at 161.754,91.246 h1.52 r270
  text "LCD" at 122.746,83.754 h1.52 r90
  text "LED" at 161.754,73.246 h1.52 r270
  text "BTN01" at 122.746,64.754 h1.52 r90
  text "SPKR" at 161.754,62.746 h1.52 r270
  text "BTN02" at 122.746,54.254 h1.52 r90
  text "PWR" at 140.254,43.254 h1.52
  text "reset" at 130.75,42.25 h1
  text "Boot" at 155.75,42.25 h1
Mechanical 1:
  lines w0.254: 120,42.77 ccw(c121.27,42.77) 121.27,41.5 143,41.5 163.23,41.5 ccw(c163.23,42.77) 164.5,42.77 164.5,102.73 ccw(c163.23,102.73) 163.23,104 121.27,104 ccw(c121.27,102.73) 120,102.73 120,42.77